# EAGLE board Laboratory 1 - TinkerCad (OR Distributive Property)_ Part 2 – Prove the OR Distributive Property  (EAGLE 7.6.0)

Size 56.82 x 53.33 mm. Coordinates in mm from the lower left corner, seen from the top.
Outline: 0,0 56.82,0 56.82,53.33 0,53.33 0,0
Copper layers (1*16): Top 0.035mm / dielectric 1.5mm / Bottom 0.035mm
Design rules "default": minimum track width 10mil, minimum drill 24mil, track to track 8mil, track to pad 8mil, pad to pad 8mil, via to via 8mil, smd to smd 8mil, copper to edge 40mil, drill to drill 8mil, minimum pad ring 10mil, minimum via ring 8mil, stop-mask expansion 4mil, vias tented up to drill 0mil, thermal gap 10mil

## Footprints (pad centres in the part's own frame; a part is rotated, then mirrored left to right if it is on the bottom)
LED5MM = drill 0.813 octagon: A -1.27,0; K 1.27,0
2P-2.54-65/35MIL = drill 0.889 pad 1.651 square: 1 0,1.27 | drill 0.889 pad 1.651: 2 0,-1.27
0207/10 = drill 0.813 octagon: 1 -5.08,0; 2 5.08,0
M251 = drill 0.813 long: 1 -2.54,0; 2 0,0; 3 2.54,0
DIL14 = drill 0.813 long: 1 -7.62,-3.81; 2 -5.08,-3.81; 3 -2.54,-3.81; 4 0,-3.81; 5 2.54,-3.81; 6 5.08,-3.81; 7 7.62,-3.81; 8 7.62,3.81; 9 5.08,3.81; 10 2.54,3.81; 11 0,3.81; 12 -2.54,3.81; 13 -5.08,3.81; 14 -7.62,3.81

## Placement (x,y rotation side)
D1  [LED5MM]  5,22.78 0 top
D2  [LED5MM]  5,35.48 0 top
D3  [LED5MM]  5,213.28 0 top  (outside the outline)
D4  [LED5MM]  5,225.98 0 top  (outside the outline)
P1  5V  [2P-2.54-65/35MIL]  5,98.98 0 top  (outside the outline)
P2  5V  [2P-2.54-65/35MIL]  5,137.08 0 top  (outside the outline)
R1  220‎Ω  [0207/10]  5,73.58 0 top  (outside the outline)
R2  220‎Ω  [0207/10]  5,86.28 0 top  (outside the outline)
R3  220‎Ω  [0207/10]  5,238.68 0 top  (outside the outline)
R4  220‎Ω  [0207/10]  5,251.38 0 top  (outside the outline)
S1  [M251]  5,111.68 0 top  (outside the outline)
S2  [M251]  5,10.08 0 top
S3  [M251]  5,124.38 0 top  (outside the outline)
S4  [M251]  5,149.78 0 top  (outside the outline)
S5  [M251]  5,162.48 0 top  (outside the outline)
S6  [M251]  5,175.18 0 top  (outside the outline)
U1  [DIL14]  5,48.18 0 top
U2  [DIL14]  5,60.88 0 top  (outside the outline)
U3  [DIL14]  5,187.88 0 top  (outside the outline)
U4  [DIL14]  5,200.58 0 top  (outside the outline)

## Library data of the parts
D1-D4 P1 P2 R1-R4 S1-S6 U1-U4 = AUTODESK_CIRCUITS_BREADBOARD

## Nets
N$1: D2.K R2.2
N$2: U1.3 U2.2
N$3: U1.5
N$4: U1.9
N$5: U1.11
N$6: U1.12
N$7: U1.4
N$8: U1.6
N$9: U1.8
N$10: U1.10
N$11: U1.13
N$12: D2.A U2.3
N$13: U2.11
N$14: U2.12
N$15: U2.13
N$16: U2.6
N$17: U2.8
N$18: U2.9
N$19: U2.10
N$20: D1.K R1.2
N$21: S1.2 U1.1
N$22: S2.2 U2.1
N$23: P1.2 S1.3 S2.3 S3.3 U1.14 U2.14
N$24: P1.1 R1.1 R2.1 S1.1 S2.1 S3.1 U1.7 U2.7
N$25: S3.2 U1.2
N$26: U2.5
N$27: U2.4
N$28: D1.A
N$29: S4.2 U4.12
N$30: P2.1 R3.1 R4.1 S4.1 S5.1 S6.1 U3.7 U4.7
N$31: P2.2 S4.3 S5.3 S6.3 U3.14 U4.14
N$32: S6.2 U4.2 U4.13
N$33: U3.5
N$34: U3.9
N$35: U3.4
N$36: U3.6
N$37: U3.8
N$38: U3.10
N$39: U4.5
N$40: U4.4
N$41: U4.6
N$42: U4.8
N$43: U4.9
N$44: U4.10
N$45: D3.K R4.2
N$46: D4.K R3.2
N$47: U3.12
N$48: U3.13
N$49: U3.1 U4.3
N$50: D4.A U3.3
N$51: U3.2 U4.11
N$52: D3.A
N$53: U3.11
N$54: S5.2 U4.1

## Tracks (layer width: path | path; a pad name or v marks a point on that pad's centre or on a via)
N$1  (1 unrouted)
N$2  (1 unrouted)
N$12  (1 unrouted)
N$20  (1 unrouted)
N$21  (1 unrouted)
N$22  (1 unrouted)
N$23  (5 unrouted)
N$24  (7 unrouted)
N$25  (1 unrouted)
N$29  (1 unrouted)
N$30  (7 unrouted)
N$31  (5 unrouted)
N$32  (2 unrouted)
N$45  (1 unrouted)
N$46  (1 unrouted)
N$49  (1 unrouted)
N$50  (1 unrouted)
N$51  (1 unrouted)
N$54  (1 unrouted)